# Altium PCB PCB1.PcbDoc
Units mm, origin at the board's own origin, x right, y up, seen from the top; angles counter-clockwise.
Board outline 48.75 x 14.85 mm, 2 copper layers (Top Layer, Bottom Layer); 31 components, 15 nets, 70 pads, 16 vias.
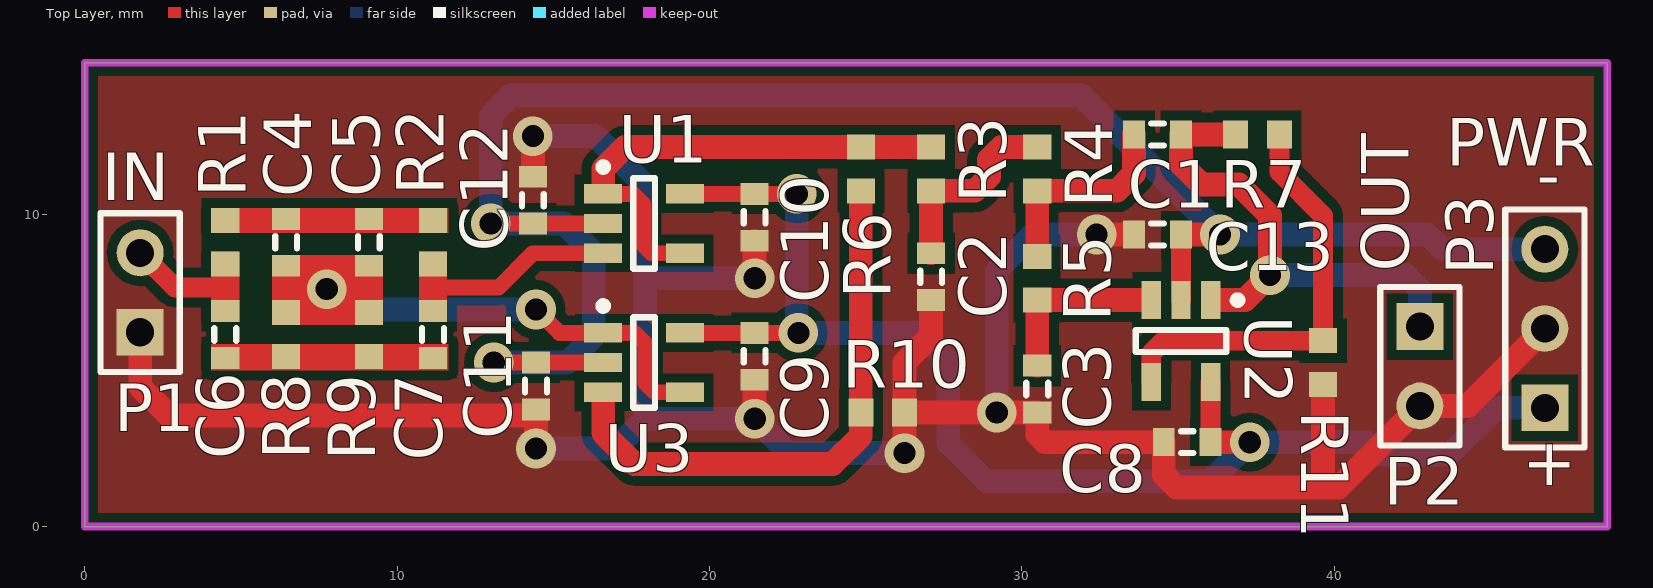
[diagram p0: Top Layer view]
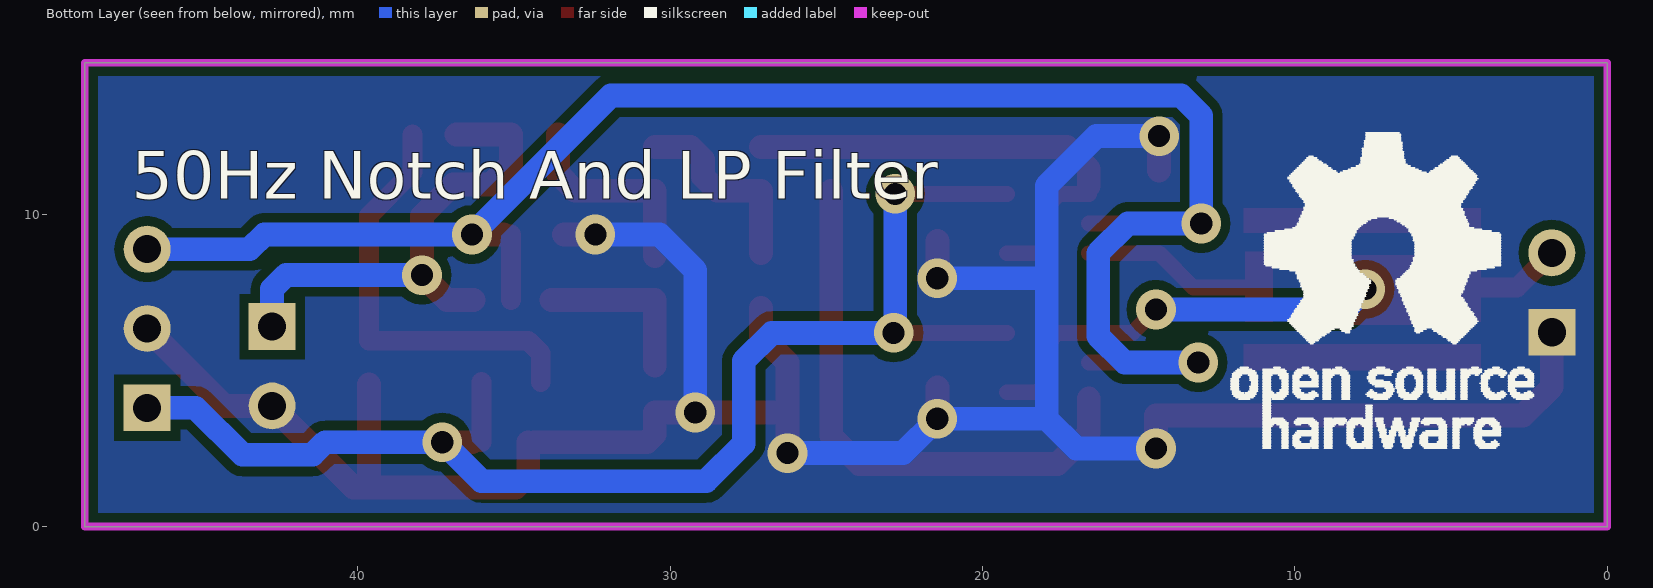
[diagram p1: Bottom Layer view, seen from below]

## Layer stack, top to bottom
Top Solder: solder mask 0.0102, Solder Resist, Dk 3.5
Top Layer: signal copper 0.0356
Dielectric1: dielectric 0.32, FR-4, Dk 4.8
Bottom Layer: signal copper 0.0356
Bottom Solder: solder mask 0.0102, Solder Resist, Dk 3.5

## Board outline
0,0 0,14.85 48.75,14.85 48.75,0

## Design rules (kind name [scope] priority, off if disabled: settings)
Clearance Clearance_3 [InNamedPolygon('top_GND') vs not InNet('GND')] p1: gap=0.305
Clearance Clearance_2 [InNamedPolygon('bottom_GND') vs not InNet('GND')] p2: gap=0.305
Clearance Clearance_1 [OnLayer('Bottom Layer') vs OnLayer('Bottom Layer')] p3: gap=0.305
Clearance [OnLayer('Top Layer') vs OnLayer('Top Layer')] p4: gap=0.305
DiffPairsRouting [All] p1: maxlimit=25.4 minlimit=0.203 mostfreqgap=0.254 toplayer_minwidth=0.381 toplayer_maxwidth=0.381 toplayer_prefwidth=0.381 bottomlayer_minwidth=0.381 bottomlayer_maxwidth=0.381 bottomlayer_prefwidth=0.381 maxuncoupledlength=12.7
MinimumSolderMaskSliver [All] p1: minsoldermaskwidth=0
PlaneConnect [All] p1: planeconnectstyle=Direct reliefexpansion=0.508 reliefentries=4 reliefconductorwidth=0.254 reliefairgap=0.254
PolygonConnect [All] p1: connectstyle=Direct reliefconductorwidth=0.254 reliefentries=4 polygonreliefangle="90 Angle" airgapwidth=0.254
RoutingVias [All] p1: holewidth=0.711 width=1.27 viastyle="Through Hole" minholewidth=0.3 minwidth=0.6 maxholewidth=71.12 maxwidth=127
SilkToSilkClearance [All] p1: silktosilkclearance=0
SilkToSolderMaskClearance SilkscreenOverComponentPads [IsPad] p1: minsilkscreentomaskgap=0 clearancetoexposedcopper=TRUE
SolderMaskExpansion [All] p1: expansion=0.102
Width [All] p1: maxlimit=25.4 minlimit=0.203 preferedwidth=0.254
25 further rules are at their usual default settings.

## Components (designator, comment, footprint, x,y, rotation, side; value= is the part's Value field where it differs from the comment)
C1 "0603" J1-0603 34.35,12.55 r180 top
C2 "0603" J1-0603 27.1,8 r90 top
C3 "0603" J1-0603 30.5,4.4 r90 top
C4 "0603" J1-0603 6.45,9.1 r90 top
C5 "0603" J1-0603 9.1,9.1 r90 top
C6 "0603" J1-0603 4.5,6.15 r90 top
C7 "0603" J1-0603 11.15,6.15 r270 top
C8 "0603" J1-0603 35.3,2.7 r180 top
C9 "0603" J1-0603 21.45,5.45 r270 top
C10 "0603" J1-0603 21.45,9.9 r270 top
C11 "0603" J1-0603 14.45,4.5 r270 top
C12 "0603" J1-0603 14.35,10.45 r90 top
C13 "0603" J1-0603 34.35,9.35 r180 top
P1 "INPUT" HDR1X2 1.776,6.221 r90 top
P2 "OUTPUT" HDR1X2 42.75,6.4 r270 top
P3 "Header 3" HDR1X3 46.75,3.8 r90 top
R1 "0603" 1608[0603] 4.5,9.1 r90 top
R2 "0603" 1608[0603] 11.15,9.1 r270 top
R3 "0603" 1608[0603] 27.1,11.45 r90 top
R4 "0603" 1608[0603] 30.5,11.45 r90 top
R5 "0603" 1608[0603] 30.5,7.95 r90 top
R6 "0603" 1608[0603] 24.85,11.45 r90 top
R7 "0603" 1608[0603] 37.55,12.55 r0 top
R8 "0603" 1608[0603] 6.45,6.15 r270 top
R9 "0603" 1608[0603] 9.1,6.15 r270 top
R10 "0603" 1608[0603] 25.55,3.65 r0 top
R11 "0603" 1608[0603] 39.65,5.25 r90 top
U1 "LTC6240" LTC6240_SOT23 16.6,10.65 r0 top
U2 "LTC6240" LTC6240_SOT23 36.05,7.25 r270 top
U3 "LTC6240" LTC6240_SOT23 16.6,6.2 r0 top
? "Comment" "OpenSourceLOGO small" 7.1,7.65 r180 bottom

## Footprints (in the part's own frame and the unit in brackets; to place one, negate y for a bottom-side part, rotate by r counter-clockwise, add the part's x,y. Pads: shape width x height; smd on the part's side, far side on the other; paste and mask are expansions set on the pad)
1608[0603] [mm] "Chip Capacitor, Body 1.6x0.8mm, IPC High Density"
  rect 0.8x0.9 smd: 1(-0.7,0) 2(0.7,0)
  body extent -0.87,-0.48 0.87,0.48, height 1.3
HDR1X2 [mm] "Connector; Header; 2 Position"
  rect 1.5x1.5 hole 0.9: 1(0,0)
  round 1.5 hole 0.9: 2(2.54,0)
  silkscreen extent -1.27,-1.27 3.81,1.27
HDR1X3 [mm] "Connector; Header; 3 Position"
  rect 1.5x1.5 hole 0.9: 1(0,0)
  round 1.5 hole 0.9: 2(2.54,0) 3(5.08,0)
  silkscreen extent -1.27,-1.27 6.35,1.27
J1-0603 [mm] "Chip Resistor, Body 1.6x0.8mm, IPC High Density"
  rect 0.7x0.9 smd: 1(-0.75,0) 2(0.75,0)
  silkscreen extent -0.2,-0.35 0.2,0.35, body extent -0.85,-0.48 0.85,0.48, height 0.9
LTC6240_SOT23 [mm] "SOT23, 5-Leads, Body 2,9x2,8mm (max), Pitch 0,95mm, IPC Medium Density"
  rect 1.22x0.62 smd: 1(0,0) 2(0,-0.95) 3(0,-1.9) 4(2.62,-1.9) 5(2.62,0)
  silkscreen extent -0.12,-2.4 1.66,0.98, body extent 0.44,-2.4 2.18,0.5, height 1
"OpenSourceLOGO small" [mm]
  silkscreen extent -4.95,-5.15 4.75,4.96

## Part data
C1 C2 C3 C4 C5 C6 C7 C8 C9 C10 C11 C12 C13: library part Cap, "Capacitor"
P1 P2: library part "Header 2", "Header, 2-Pin"
P3: "Header, 3-Pin"
R1 R2 R3 R4 R5 R6 R7 R8 R9 R10 R11: library part Res2, "Resistor"
U1 U2 U3: "low noise jfet opamp"

## Via types
v1: diameter 1.27, hole 0.711, Top Layer to Bottom Layer, 15 vias
v2: diameter 1.27, hole 0.711, Top Layer to Bottom Layer, tented bottom, 1 vias

## Nets (pads, with @x,y where several pads share a name; then routed paths per layer and width w, separated by ;. In a path a pad name is that pad's centre, name@x,y a point inside that pad or via, vN(x,y) a via of type N, cw(c..) or ccw(c..) an arc to the next point about the centre after c; other vN are vias at no path point)
GND: C2.1 C3.1 C8.2 C9.2 C10.2 C11.2 C12.2 C13.2 P1.1 P2.2 P3.2 R10.2 R11.1 | length 89
  Top Layer w0.762: P1.1 1.776,4.474 2.7,3.55 14.45,3.55 v1(14.45,2.5) ; C12.2@14.35,11.4 v2(14.35,12.5) ; v1(21.45,3.45) C9.2@21.45,4.45 ; v1(21.45,7.95) C10.2 ; v1(26.25,2.35) R10.2 ; C2.1@27.1,7 27.1,6.1 26.25,5.25 R10.2 ; v1(32.4,9.35) C13.2@33.4,9.35 ; C8.2@34.35,2.7 30.75,2.7 30.5,2.95 C3.1 v1(29.2,3.65) 28.5,3.65 R10.2 ; C8.2 34.55,1.65 34.95,1.25 39.65,1.25 ; R11.1 39.65,1.25 ; P3.2 44.27,3.86 P2.2 40.14,1.25 39.65,1.25
  Bottom Layer w0.762: v2(14.35,12.5) 16.35,12.5 17.95,10.9 17.95,7.95 ; v1(14.45,2.5) 17,2.5 17.95,3.45 ; v1(21.45,7.95) 17.95,7.95 ; v1(26.25,2.35) 22.55,2.35 v1(21.45,3.45) 17.95,3.45 ; v1(29.2,3.65) 29.2,8.2 30.35,9.35 v1(32.4,9.35) ; 17.95,3.45 17.95,7.95
NetC1_1: C1.1 P2.1 R7.1 U2.1 | length 16.3
  Top Layer w0.762: U2.1@36.3,7.25 37.15,7.25 v1(37.95,8.05) 37.95,9.95 36.95,10.95 35.75,10.95 35.1,11.6 C1.1 R7.1
  Bottom Layer w0.762: v1(37.95,8.05) 42.3,8.05 42.75,7.6 P2.1
NetC1_2: C1.2 R4.1 R5.2 | length 6.7
  Top Layer w0.762: R5.2 R4.1 33.05,10.75 33.6,11.3 C1.2
NetC2_2: C2.2 R3.1 R4.2 | length 6.3
  Top Layer w0.762: C2.2 R3.1 28.5,10.75 28.95,11.2 28.95,11.75 29.35,12.15 R4.2
NetC3_2: C3.2 R5.1 U2.3 | length 5.4
  Top Layer w0.762: C3.2 R5.1 33.8,7.25
NetC4_1: C4.1 C5.1 R8.1 R9.1 U3.1 U3.4 | length 13.6
  Top Layer w0.508: v1(14.45,6.95) 15.2,6.2 U3.1 17.6,6.2 17.95,5.85 17.95,4.6 18.25,4.3 U3.4
  Bottom Layer w0.762: v1(7.75,7.6) 8.4,6.95 v1(14.45,6.95)
NetC4_2: C4.2 C5.2 R1.2 R2.1 | length 0.1
  Top Layer w0.508: C4.2@6.4,9.8 C4.2 ; R2.1@11.1,9.85 R2.1
NetC6_1: C6.1 C7.2 R8.2 R9.2 | length 0.1
  Top Layer w0.508: R8.2@6.4,5.4 R8.2 ; C7.2@11.1,5.45 C7.2
NetC6_2: C6.2 P1.2 R1.1 | length 3.2
  Top Layer w0.635: P1.2 2.887,7.65 4.5,7.65
NetC7_1: C7.1 R2.2 U1.3 | length 5.9
  Top Layer w0.508: 11.15,7.65 13.25,7.65 14.35,8.75 U1.3
NetR3_2: R3.2 R6.2 U1.1 U1.4 | length 15.5
  Top Layer w0.508: U1.1 17.55,10.65 17.9,10.3 17.9,9 18.15,8.75 U1.4
  Top Layer w0.762: U1.1@16.6,10.9 16.6,11.45 17.3,12.15 R6.2 R3.2
NetR6_1: R6.1 R10.1 U3.3 | length 18
  Top Layer w0.762: U3.3@16.6,4.1 16.6,3 17.6,2 23.95,2 24.85,2.9 R6.1
NetR7_2: R7.2 R11.2 U2.4 | length 13.8
  Top Layer w0.635: U2.4 34.15,5.55 34.55,5.95 R11.2 39.65,9.95 38.25,11.35 R7.2
VCC: C8.1 C9.1 C10.1 P3.1 U1.5 U2.5 U3.5 | length 43.3
  Top Layer w0.508: U3.5 C9.1 v1(22.85,6.2) ; U1.5 C10.1 v1(22.8,10.65)
  Top Layer w0.635: C8.1 U2.5
  Top Layer w0.762: C8.1@36.35,2.7 v1(37.3,2.7)
  Bottom Layer w0.508: v1@22.8,6.25 v1(22.85,6.2)
  Bottom Layer w0.762: v1@22.8,6.25 v1(22.8,10.65) ; v1(22.85,6.2) 26.75,6.2 27.65,5.3 27.65,2.65 28.85,1.45 36.05,1.45 v1(37.3,2.7) 41.05,2.7 41.45,2.3 43.7,2.3 45.2,3.8 P3.1
VEE: C11.1 C12.1 C13.1 P3.3 U1.2 U2.2 U3.2 | length 59.6
  Top Layer w0.508: v1(13,9.7) U1.2 ; v1(13.1,5.25) C11.1 U3.2
  Top Layer w0.635: U2.2 C13.1
  Top Layer w0.762: C13.1@35.35,9.35 v1(36.35,9.35)
  Bottom Layer w0.762: v1(13.1,5.25) 15.45,5.25 16.3,6.1 16.3,8.75 15.35,9.7 v1(13,9.7) 13,13.15 13.65,13.8 31.9,13.8 v1(36.35,9.35) 43,9.35 43.47,8.88 P3.3

## Polygon pours and split planes (outlines as drawn)
GND on Top Layer "top_GND" (solid, remove dead copper, pour order 4): 0,0 0,14.85 48.75,14.85 48.75,0
GND on Bottom Layer "bottom_GND" (solid, remove dead copper, pour order 6): 0,0 0,14.85 48.75,14.85 48.75,0

## Keep-outs
Keep-Out Layer:
  the board outline again, w0.25

## Other copper
Top Layer:
  rectangle net NetC7_1: 10.7,6.55 11.6,8.8
  rectangle net NetC4_2: 4.05,9.4 11.65,10.2
  rectangle net NetC6_1: 4.05,5 11.65,5.85
  rectangle net NetC6_2: 4.05,6.55 4.95,8.8
  rectangle net NetC4_1: 6,6.45 9.55,8.7

## Silkscreen, mask and mechanical layers (free items; w line width, h text height)
Top Overlay:
  text "-" at 47.25,11.65 h1.52 r180
  text "PWR" at 43.6,11.55 h1.52
  text "IN" at 0.55,10.45 h1.52
  text "OUT" at 42.4,8.15 h1.52 r90
  text "+" at 47.55,1.1 h1.52 r90
Bottom Overlay:
  text "50Hz Notch And LP Filter" at 47.25,10.5 h1.52